# EAGLE board ownduino-metaboard-alt (EAGLE 6.1)
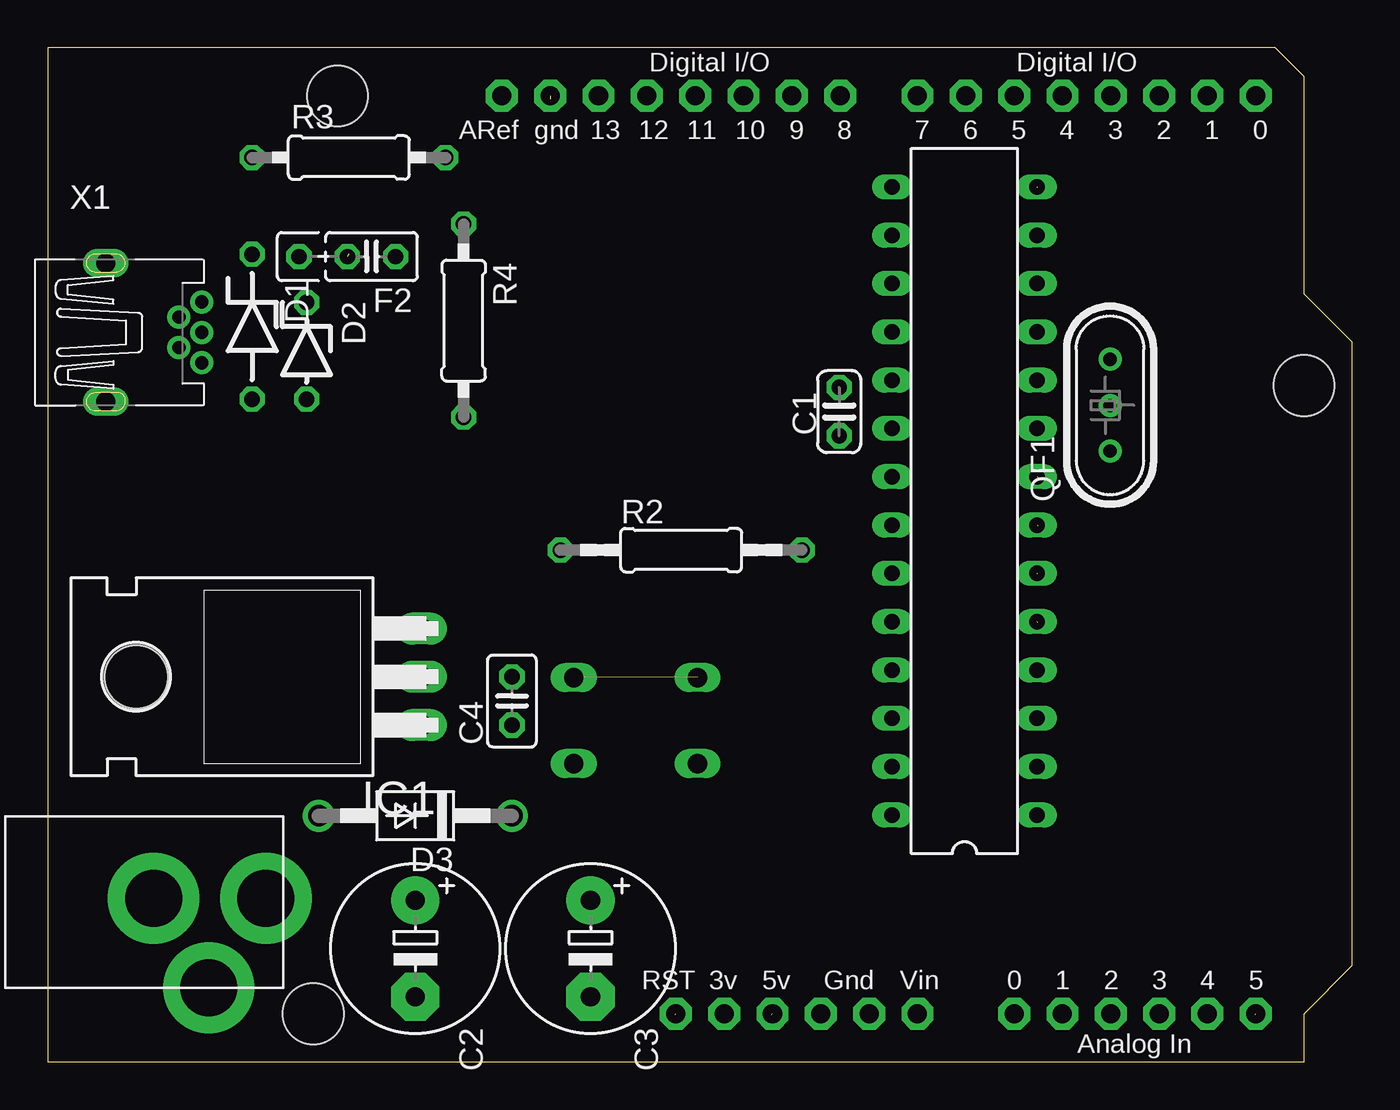
[diagram p0: board, top side]
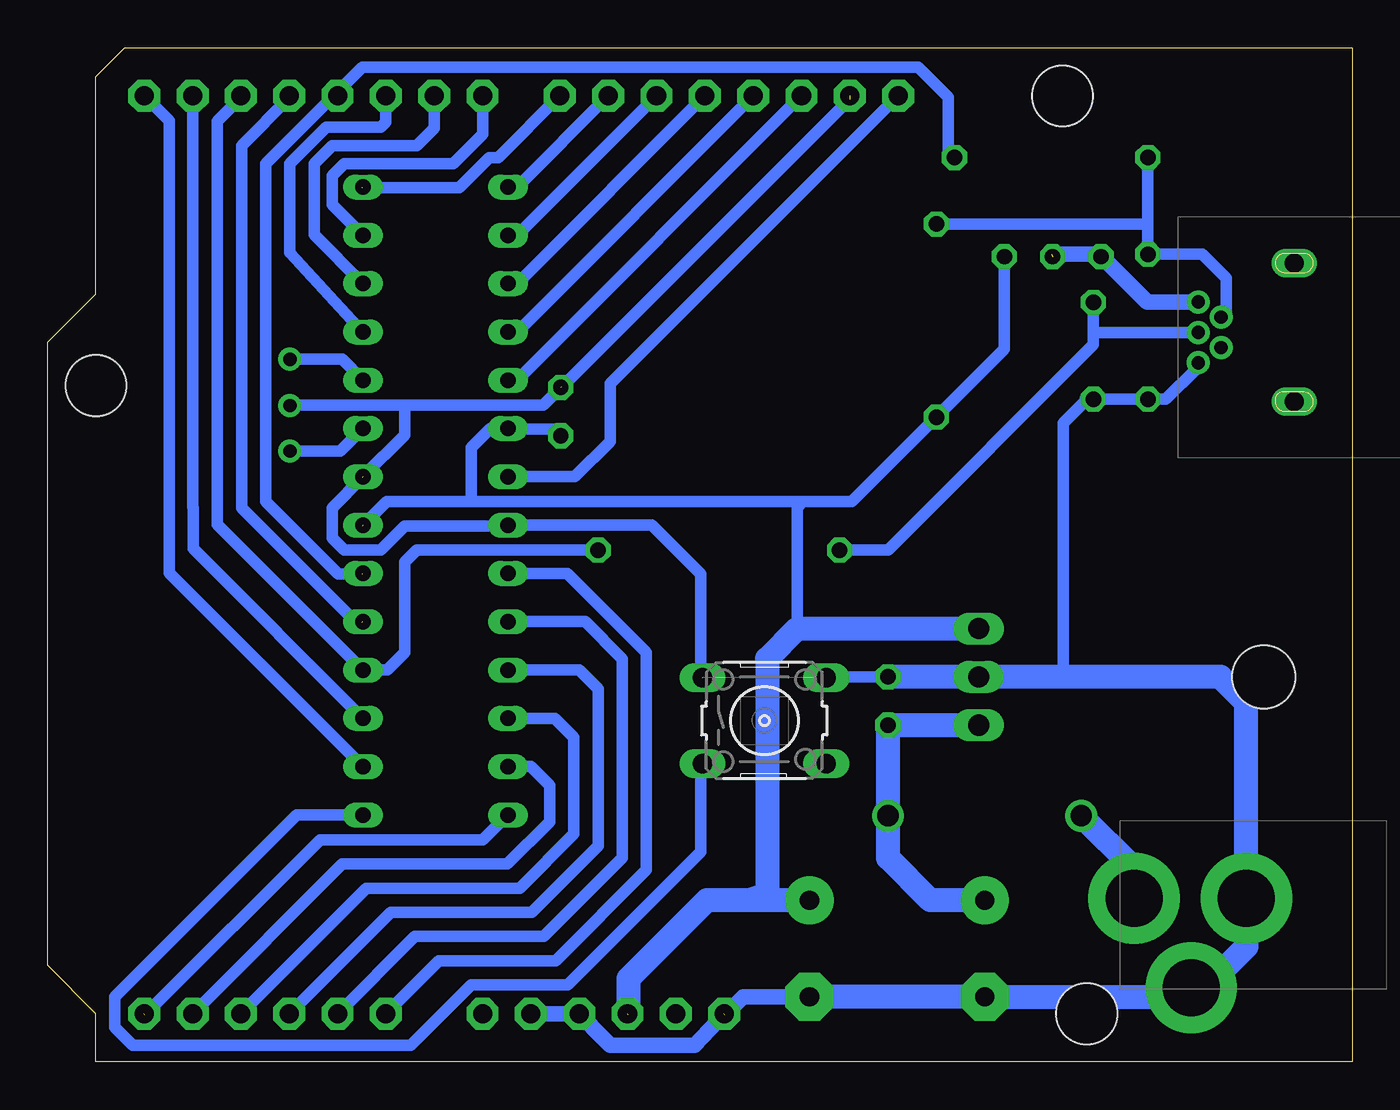
[diagram p1: board, bottom side, seen from below]

Size 68.58 x 53.34 mm. Coordinates in mm from the lower left corner, seen from the top.
Copper layers (1*16): Top 0.035mm / dielectric 1.5mm / Bottom 0.035mm
Design rules: minimum track width 10mil, minimum drill 0.6mm, track to track 8mil, track to pad 8mil, pad to pad 8mil, via to via 12mil, smd to smd 8mil, copper to edge 10mil, drill to drill 15mil, minimum pad ring 10mil, minimum via ring 12mil, stop-mask expansion 4mil, vias tented up to drill 0mil, thermal gap 10mil
Net classes: 0 default: width 0.203 mm, clearance 0.203 mm; 1 power: width 0.6 mm, clearance 0.305 mm; 2 finepitch: width 0.203 mm, clearance 0.203 mm
Holes 3.2 mm at 67.03,138.64 67.03,110.7 16.23,153.88
tRestrict: area 14.3,152 to 18.1,155.8; area 65.1,136.7 to 68.9,140.5; area 65.1,108.8 to 68.9,112.6; 10 lines
bRestrict: area 14.3,152 to 18.1,155.8; area 65.1,136.7 to 68.9,140.5; area 65.1,108.8 to 68.9,112.6; 8 lines

## Footprints (pad centres in the part's own frame; a part is rotated, then mirrored left to right if it is on the bottom)
DIL28-3 = drill 0.813 long: 1 -16.51,-3.81; 2 -13.97,-3.81; 3 -11.43,-3.81; 4 -8.89,-3.81; 5 -6.35,-3.81; 6 -3.81,-3.81; 7 -1.27,-3.81; 8 1.27,-3.81; 9 3.81,-3.81; 10 6.35,-3.81; 11 8.89,-3.81; 12 11.43,-3.81; 13 13.97,-3.81; 14 16.51,-3.81; 15 16.51,3.81; 16 13.97,3.81; 17 11.43,3.81; 18 8.89,3.81; 19 6.35,3.81; 20 3.81,3.81; 21 1.27,3.81; 22 -1.27,3.81; 23 -3.81,3.81; 24 -6.35,3.81; 25 -8.89,3.81; 26 -11.43,3.81; 27 -13.97,3.81; 28 -16.51,3.81
C025-024X044 = drill 0.813 octagon: 1 -1.27,0; 2 1.27,0
E5-8,5 = drill 1.016 pad 2.54: + -2.54,0 | drill 1.016 pad 2.54 octagon: - 2.54,0
C025-025X050 = drill 0.813 octagon: 1 -1.27,0; 2 1.27,0
ZDIO-7.5 = drill 0.813 octagon: A 3.81,0; C -3.81,0
ZDIO-5 = drill 0.813 octagon: A 2.54,0; C -2.54,0
DO41-10 = drill 1.118: A 5.08,0; C -5.08,0
C025_050-025X075 = drill 0.813 octagon: 1 -1.27,0; 2 1.27,0; 3 3.81,0
TO220H = drill 1.118 long: 1 -2.54,-10.16; 2 0,-10.16; 3 2.54,-10.16 | hole 3.302: 0,4.826
HC49U = drill 0.7 pad 1.2: 1 -2.413,0; 2 -0.027,0; 3 2.413,0
0207/12 = drill 0.813 octagon: 1 -6.35,0; 2 6.35,0
0207/10 = drill 0.813 octagon: 1 -5.08,0; 2 5.08,0
B3F-10XX = drill 1.016 long: 1 -3.251,2.261; 2 3.251,2.261; 3 -3.251,-2.261; 4 3.251,-2.261
ARDUINO = drill 1 pad 1.676 octagon: 3V 35.56,2.54; 5V 38.1,2.54; A0 50.8,2.54; A1 53.34,2.54; A2 55.88,2.54; A3 58.42,2.54; A4 60.96,2.54; A5 63.5,2.54; AREF 23.876,50.8; D0 63.5,50.8; D1 60.96,50.8; D2 58.42,50.8; D3 55.88,50.8; D4 53.34,50.8; D5 50.8,50.8; D6 48.26,50.8; D7 45.72,50.8; D8 41.656,50.8; D9 39.116,50.8; D10 36.576,50.8; D11 34.036,50.8; D12 31.496,50.8; D13 28.956,50.8; GND 26.416,50.8; GND1 43.18,2.54; GND2 40.64,2.54; RESET 33.02,2.54; VIN 45.72,2.54 | hole 3.2: 15.24,50.8; 66.04,35.56; 13.97,2.54
PJ-102A = drill 3 pad 4.8: RING 0.1,-3.39; RING_SW -4.6,-6.29; TIP 0.1,-9.29
32005-601 = drill 0.7 pad 1.016: 1 2.825,1.6; 2 1.625,0.8; 3 2.825,0; 4 1.625,-0.8; 5 2.825,-1.6 | drill 1 pad 1.422 long: M1 -2.225,3.65; M2 -2.225,-3.65

## Placement (x,y rotation side)
BVALUE  ATMEGA168  [DIL28-3]  48.19,29.5 90 top
C1  100n  [C025-024X044]  41.61,34.2 90 top
C2  [E5-8,5]  19.33,5.96 270 top
C3  [E5-8,5]  28.54,5.96 270 top
C4  [C025-025X050]  24.41,18.98 90 top
D1  [ZDIO-7.5]  10.76,38.67 270 top
D2  [ZDIO-5]  13.61,37.4 270 top
D3  1N4004  [DO41-10]  19.33,12.95 180 top
F2  PTC-FUSE  [C025_050-025X075]  17.03,42.35 180 top
IC1  7805T  [TO220H]  9.49,20.25 90 top
QF1  10M7AHC49U  [HC49U]  55.84,34.54 90 top
R2  [0207/12]  33.3,26.92 0 top
R3  [0207/10]  15.84,47.56 0 top
R4  [0207/10]  21.87,38.98 270 top
RESET  [B3F-10XX]  30.91,17.95 0 bottom
U$1  ARDUINOUNO  [ARDUINO]  0,0 0 top
U$2  2.1MMJACKTHM  [PJ-102A]  2.18,8.5 90 top
X1  M-USB  [32005-601]  5.28,38.36 0 top

## Library data of the parts
BVALUE = my-library
C1-C4 F2 R2-R4 = rcl
D1-D3 = diode
IC1 U$1 U$2 = adafruit
QF1 = crystal; OC_FARNELL: unknown; OC_NEWARK: unknown
RESET = switch-omron
X1 = con-cypressindustries; OC_FARNELL: unknown; OC_NEWARK: unknown

## Nets
3V: U$1.3V
+5V [power]: BVALUE.7 BVALUE.20 C1.1 C3.+ F2.1 IC1.3 R4.2 U$1.5V
A0: BVALUE.23 U$1.A0
A1: BVALUE.24 U$1.A1
A2: BVALUE.25 U$1.A2
A3: BVALUE.26 U$1.A3
A4: BVALUE.27 U$1.A4
A5: BVALUE.28 U$1.A5
AREF: BVALUE.21 U$1.AREF
D0: BVALUE.2 U$1.D0
D1: BVALUE.3 U$1.D1
D2: BVALUE.4 R2.2 U$1.D2
D3: BVALUE.5 U$1.D3
D4: BVALUE.6 R3.2 U$1.D4
D5: BVALUE.11 U$1.D5
D6: BVALUE.12 U$1.D6
D7: BVALUE.13 U$1.D7
D8: BVALUE.14 U$1.D8
D9: BVALUE.15 U$1.D9
D10: BVALUE.16 U$1.D10
D11-MOSI: BVALUE.17 U$1.D11
D12-MISO: BVALUE.18 U$1.D12
D13-SCK: BVALUE.19 U$1.D13
D+: D2.C R2.1 X1.3
D-: D1.C R3.1 R4.1 X1.2
GND [power]: BVALUE.8 BVALUE.22 C1.2 C2.- C3.- C4.2 D1.A D2.A IC1.2 QF1.2 RESET.1 U$1.GND U$1.GND1 U$1.GND2 U$1.RESET U$2.RING U$2.RING_SW X1.5
N$2: BVALUE.1 RESET.3
N$3: C2.+ C4.1 D3.C IC1.1
N$4: D3.A U$2.TIP
N$5: BVALUE.9 QF1.1
N$6: BVALUE.10 QF1.3
N$38: F2.2 X1.1
VIN: U$1.VIN

## Tracks (layer width: path | path; a pad name or v marks a point on that pad's centre or on a via)
+5V  (2 unrouted)
  Bottom 0.61: 52.03,28.19 50.76,29.46 46.32,29.46 | F2.1 18.3,37.47 R4.2 26.31,29.46 28.85,29.46 | 28.85,29.46 46.32,29.46 | 29.17,22.79 29.17,29.14 28.85,29.46 | C1.1 41.61,33.01 41.87,33.27 44.34,33.27 BVALUE.20 45.32,33.31 46.32,32.32 46.32,29.46
  Bottom 1.27: 38.06,2.47 38.06,4.37 33.93,8.5 31.71,8.5 | IC1.3 29.17,22.79 30.76,21.2 30.76,8.82 31.71,8.5 | C3.+ 31.71,8.5
A0
  Bottom 0.61: BVALUE.23 41.28,25.69 37.11,21.52 37.11,10.09 41.87,5.33 48.01,5.33 U$1.A0
A1
  Bottom 0.61: BVALUE.24 40.33,23.15 38.38,21.2 38.38,10.73 42.51,6.6 49.28,6.6 U$1.A1
A2
  Bottom 0.61: BVALUE.25 40.64,20.61 39.65,19.62 39.65,11.36 43.14,7.87 50.55,7.87 U$1.A2
A3
  Bottom 0.61: 58.38,2.58 U$1.A3 51.82,9.14 43.77,9.14 40.92,11.99 40.92,17.07 41.91,18.07 BVALUE.26
A4
  Bottom 0.61: 60.92,2.58 U$1.A4 53.09,10.41 44.41,10.41 42.19,12.63 42.19,14.54 43.18,15.53 BVALUE.27
A5  (1 unrouted)
  Bottom 0.61: BVALUE.28 45.7,11.68 54.25,11.68 63.46,2.47
AREF
  Bottom 0.61: BVALUE.21 40.87,30.77 39.01,32.63 39.01,35.66 U$1.AREF
D0
  Bottom 0.61: U$1.D0 62.19,49.49 62.19,25.72 BVALUE.2
D1
  Bottom 0.61: BVALUE.3 60.92,26.99 60.92,29.14 60.96,29.18 U$1.D1
D2
  Bottom 0.61: R2.2 49.17,26.92 49.81,26.28 49.81,21.52 50.72,20.61 BVALUE.4 59.65,28.26 59.65,49.46 58.42,50.69 U$1.D2
D3  (1 unrouted)
  Bottom 0.61: 52.03,23.11 52.35,23.11 58.38,29.14 58.38,48.19 55.88,50.69 U$1.D3
D4  (1 unrouted)
  Bottom 0.61: 52.03,25.65 53.3,25.65 57.11,29.46 57.11,47.24 53.55,50.8 U$1.D4 53.34,51.01 52.03,52.32 22.82,52.32 21.23,50.73 21.23,47.87 R3.2
D5
  Bottom 0.61: U$1.D5 50.8,49.42 51.08,49.14 53.94,49.14 55.84,47.24 55.84,42.55 BVALUE.11
D6
  Bottom 0.61: U$1.D6 48.26,49.1 49.17,48.19 53.62,48.19 54.57,47.24 54.57,43.5 BVALUE.12
D7
  Bottom 0.61: U$1.D7 45.72,48.79 47.27,47.24 52.98,47.24 53.62,46.6 53.62,45.09 BVALUE.13
D8  (1 unrouted)
  Bottom 0.61: 52.03,45.97 46.95,45.97 45.36,47.56 44.9,47.56 U$1.D8
D9
  Bottom 0.61: BVALUE.15 43.91,46.01 U$1.D9
D10
  Bottom 0.61: BVALUE.16 43.91,43.47 U$1.D10
D11-MOSI
  Bottom 0.61: BVALUE.17 43.91,40.93 U$1.D11
D12-MISO
  Bottom 0.61: BVALUE.18 43.91,38.39 U$1.D12
D13-SCK
  Bottom 0.61: BVALUE.19 43.91,35.85 U$1.D13
D+
  Bottom 0.61: X1.3 13.6,38.36 13.61,38.35 D2.C 13.61,37.71 24.41,26.92 R2.1
D-
  Bottom 0.61: X1.2 6.63,39.44 6.63,41.2 7.9,42.48 D1.C 10.75,44.06 | 10.75,44.06 R4.1 | 10.75,44.06 R3.1
GND  (5 unrouted)
  Bottom 0.61: 13.3,34.85 D1.A 9.8,34.85 8.22,36.44 8.22,36.65 X1.5 | 15.2,20.25 15.2,33.59 13.93,34.85 | C4.2 28.22,20.25 | 26.42,50.63 41.55,35.49 | C1.2 42.54,34.54 49.81,34.54 | QF1.2 55.81,34.54 49.81,34.54 | 52.03,30.73 53.62,29.14 53.62,27.55 52.98,26.92 51.08,26.92 49.81,28.19 44.43,28.19 BVALUE.22 36.83,28.23 34.25,25.65 34.25,20.3 RESET.1 | BVALUE.8 49.81,32.97 49.81,34.54
  Bottom 0.813: U$1.GND1 U$1.GND2 39.33,1.2 39.01,0.88 34.57,0.88 U$1.RESET | C3.- 32.03,3.42 32.98,2.47 | 13.93,34.85 D2.A 13.3,34.85
  Bottom 1.27: C3.- C2.- 8.22,3.42 | C4.2 IC1.2 15.2,20.25 6.94,20.25 5.57,18.88 U$2.RING 5.57,6.07 8.22,3.42 | 8.22,3.42 8.22,3.65 U$2.RING_SW
N$2
  Bottom 0.61: BVALUE.1 55.48,12.99 65.05,3.42 65.05,1.84 64.09,0.88 49.49,0.88 46.32,4.06 41.23,4.06 34.25,11.04 34.25,15.69 RESET.3
N$3
  Bottom 1.27: C2.+ 22.19,8.5 24.41,10.73 D3.C C4.1 IC1.1
N$4
  Bottom 1.27: U$2.TIP 11.47,10.17 D3.A
N$5
  Bottom 0.61: QF1.1 53.19,32.12 BVALUE.9
N$6
  Bottom 0.61: QF1.3 53.1,36.95 BVALUE.10
N$38  (1 unrouted)
  Bottom 0.813: X1.1 10.78,39.96 13.3,42.48 15.83,42.48

## Text on the board
tNames: F1
Edit History: 20070917 WestfW: Move (CC) symbol, use silk_gen to get 5mil widths | 20070917 WestfW: Manual route some, autoroute rest. Fiddle. | 20070917 WestfW: Now V1.16. Change components to TH. | 20070911 WestfW: Now V1.15. Move tracks slightly for shielding | 20070900 Daniel: Schematic and initial placement
_tsilk: C12 | C8 | 3 2 1 0 9 8 | 7 6 5 4 3 2 1 0 | RX | TX | 1 1 1 1 | Digital | X2 | AREF | GND | R7 | PWM | PWM | PWM | PWM | PWM | PWM | PWR | IC1 | 13 | Freeduino | FT232RL | c | c | R10 | V1.16 | TX | R8 | RX | 16Mhz | 1 | R1 | R9 | C3 | C10 | R12 | ]USB | R11 | ]EXT | F1 | Q1 | C2 | ICSP | RESET | 1 | CRS | M. Banzi | D. Cuartielles | D. Mellis | N. Zambetti | C5 | C4 | ATMEGA168 | IC2 | D1 | C1 | 47u | C7 | 47u | C6 | C9 | Analog in | 5V Gnd 9V | RESET | 3.3V | 0 1 2 3 4 5 | 9V in